# Altium PCB PCB1.PcbDoc
Units mil, origin at the board's own origin, x right, y up, seen from the top; angles counter-clockwise.
Board outline 6000 x 4000 mil, 2 copper layers (Top Layer, Bottom Layer); 280 components, 352 nets, 1024 pads, 0 vias.
Unrouted connection lines stored in the file: 551.
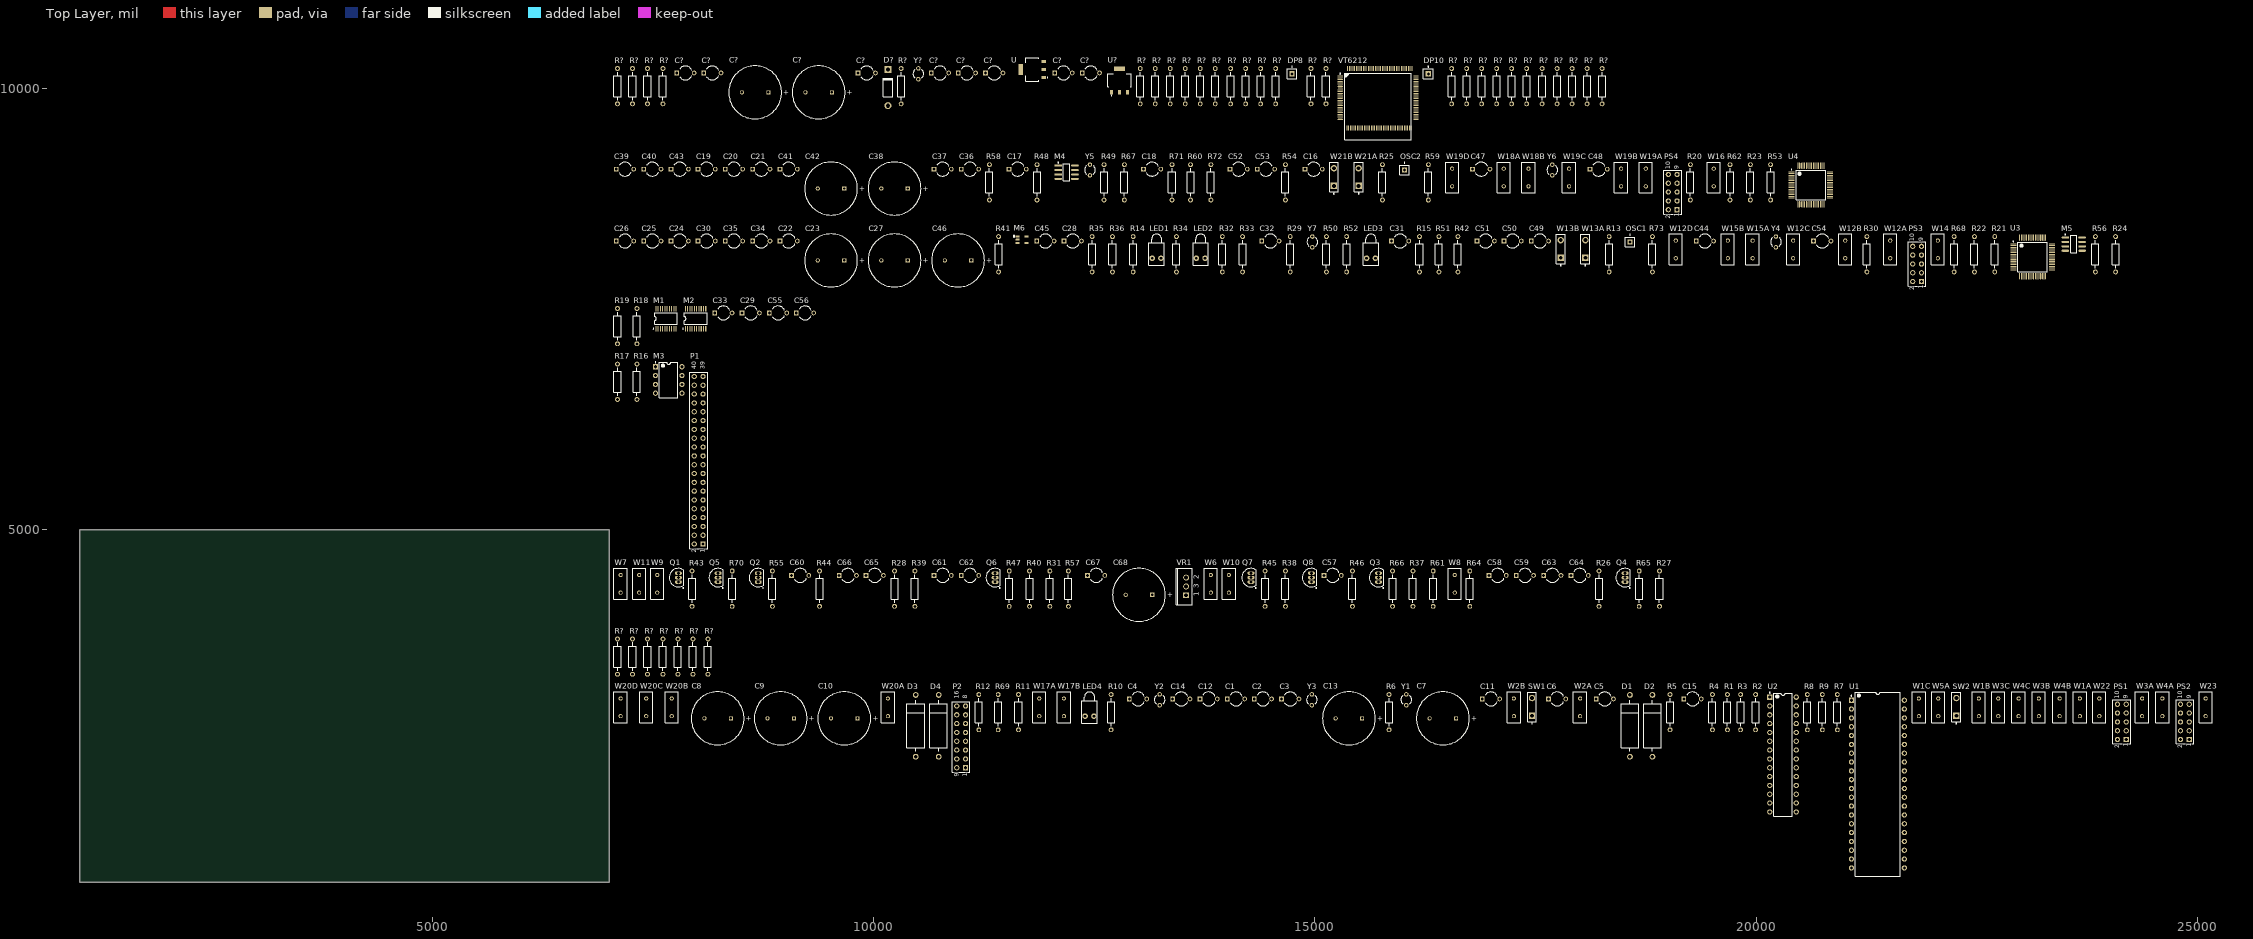
[diagram p0: Top Layer view]
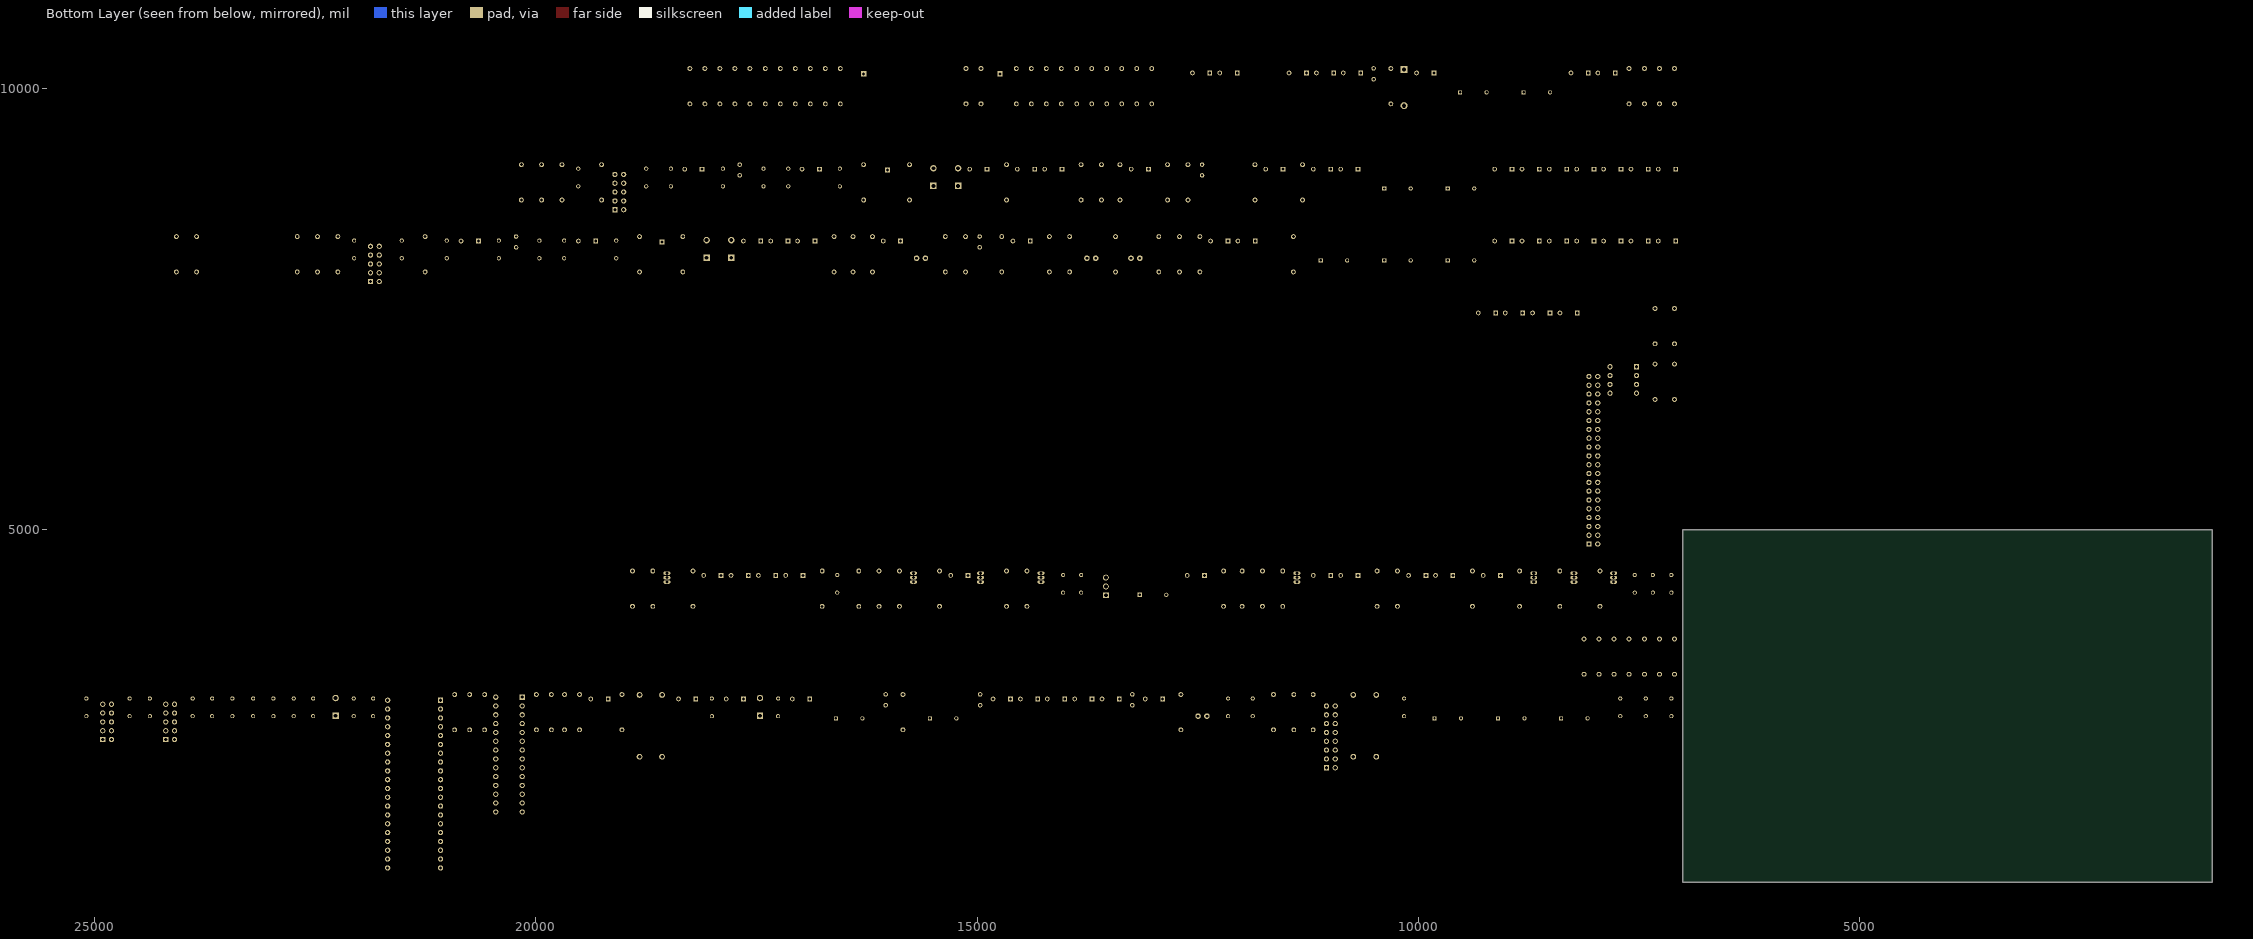
[diagram p1: Bottom Layer view, seen from below]

## Layer stack, top to bottom
Top Solder: solder mask 0.4, Solder Resist, Dk 3.5
Top Layer: signal copper 1.4
Dielectric 1: dielectric 12.6, FR-4, Dk 4.8
Bottom Layer: signal copper 1.4
Bottom Solder: solder mask 0.4, Solder Resist, Dk 3.5

## Board outline
1000,1000 7000,1000 7000,5000 1000,5000

## Design rules (kind name [scope] priority, off if disabled: settings)
Clearance [All] p1: gap=10 ignorepadtopadclearanceinfootprint=FALSE except(0: Arc-Hole Track-Hole SMDPad-Hole THPad-Hole Via-Hole Fill-Hole Poly-Hole Region-Hole Text-Hole)
PolygonConnect [All] p1: connectstyle=Relief reliefconductorwidth=10 reliefentries=4 polygonreliefangle="90 Angle" airgapwidth=10
RoutingVias [All] p1: holewidth=28 width=50 viastyle="Through Hole" minholewidth=28 minwidth=50 maxholewidth=28 maxwidth=50
SolderMaskExpansion [All] p1: expansion=4
Width [All] p1: maxlimit=10 minlimit=10 preferedwidth=10
30 further rules are at their usual default settings.

## Classes and differential pairs
component class "VT6212 Chipset": C? D? DP8 DP10 R? U U? VT6212 Y?
component class "STM32 Motherboard": C22 C23 C24 C25 C26 C27 C28 C30 C31 C32 C34 C35 C44 C45 C46 C49 C50 C51 C54 LED1 LED2 LED3 M5 M6 OSC1 PS3 R13 R14 R15 R21 R22 R24 R29 R30 R32 R33 R34 R35 R36 R41 R42 R50 R51 R52 R56 R68 R73 S1 U3 W12A W12B W12C W12D W13A W13B W14 W15A W15B Y4 Y7
component class "STM32 Motherboard 2": C16 C17 C18 C19 C20 C21 C36 C37 C38 C39 C40 C41 C42 C43 C47 C48 C52 C53 M4 OSC2 PS4 R20 R23 R25 R48 R49 R53 R54 R58 R59 R60 R62 R67 R71 R72 U4 W16 W18A W18B W19A W19B W19C W19D W21A W21B Y5 Y6
component class Shifters: C29 C33 C55 C56 M1 M2 R18 R19
component class "Raspberry Pi2+ Expansion Slot": M3 P1 R16 R17
component class RandomNumberGenerator: C57 C58 C59 C60 C61 C62 C63 C64 C65 C66 C67 C68 Q1 Q2 Q3 Q4 Q5 Q6 Q7 Q8 R26 R27 R28 R31 R37 R38 R39 R40 R43 R44 R45 R46 R47 R55 R57 R61 R64 R65 R66 R70 VR1 W6 W7 W8 W9 W10 W11
component class "PCI long card 5V - 32 BIT": PCI_BUS R?
component class "ATmega Motherboard": C1 C2 C3 C4 C5 C6 C7 C8 C9 C10 C11 C12 C13 C14 C15 D1 D2 D3 D4 LED4 P2 PS1 PS2 R1 R2 R3 R4 R5 R6 R7 R8 R9 R10 R11 R12 R69 SW1 SW2 U1 U2 W1A W1B W1C W2A W2B W3A W3B W3C W4A W4B W4C W5A W17A W17B W20A W20B W20C W20D W22 W23 Y1 Y2 Y3

## Components (designator, comment, footprint, x,y, rotation, side; value= is the part's Value field where it differs from the comment)
C1 "Cap2" CAPR5-4X5 14105,3080 r0 top value="22 pf"
C2 "Cap2" CAPR5-4X5 14410,3080 r0 top value="22 pf"
C3 "Cap2" CAPR5-4X5 14720,3080 r0 top value="22 pf"
C4 "Cap2" CAPR5-4X5 12995,3080 r0 top value="22 pf"
C5 "Cap2" CAPR5-4X5 18285,3080 r0 top value="0.1 uf"
C6 "Cap2" CAPR5-4X5 17745,3080 r0 top value="0.1 uf"
C7 "Cap Pol1" RB7.6-15 16450,2860 r0 top value="1 uf"
C8 "Cap Pol1" RB7.6-15 8230,2860 r0 top value="100 uf"
C9 "Cap Pol1" RB7.6-15 8945,2860 r0 top value="100 uf"
C10 "Cap Pol1" RB7.6-15 9665,2860 r0 top value="47 uf"
C11 "Cap2" CAPR5-4X5 16995,3080 r0 top value="22 pf"
C12 "Cap2" CAPR5-4X5 13795,3080 r0 top value="22 pf"
C13 "Cap Pol1" RB7.6-15 15385,2860 r0 top value="1 uf"
C14 "Cap2" CAPR5-4X5 13485,3080 r0 top value="0.1 uf"
C15 "Cap2" CAPR5-4X5 19280,3080 r0 top value="0.1 uf"
C16 "Cap2" CAPR5-4X5 14985,9085 r0 top value="0.1 uf"
C17 "Cap2" CAPR5-4X5 11630,9085 r0 top value="15 pf"
C18 "Cap2" CAPR5-4X5 13155,9085 r0 top value="15 pf"
C19 "Cap2" CAPR5-4X5 8105,9085 r0 top value="0.1 uf"
C20 "Cap2" CAPR5-4X5 8415,9085 r0 top value="0.1 uf"
C21 "Cap2" CAPR5-4X5 8725,9085 r0 top value="0.1 uf"
C22 "Cap2" CAPR5-4X5 9035,8270 r0 top value="0.1 uf"
C23 "Cap Pol1" RB7.6-15 9515,8050 r0 top value="10 uf"
C24 "Cap2" CAPR5-4X5 7800,8270 r0 top value="0.1 uf"
C25 "Cap2" CAPR5-4X5 7490,8270 r0 top value="0.1 uf"
C26 "Cap2" CAPR5-4X5 7180,8270 r0 top value="0.1 uf"
C27 "Cap Pol1" RB7.6-15 10235,8050 r0 top value="10 uf"
C28 "Cap2" CAPR5-4X5 12255,8270 r0 top value="0.1 uf"
C29 "Cap2" CAPR5-4X5 8605,7455 r0 top value="0.1 uf"
C30 "Cap2" CAPR5-4X5 8105,8270 r0 top value="0.1 uf"
C31 "Cap2" CAPR5-4X5 15965,8270 r0 top value="15 pf"
C32 "Cap2" CAPR5-4X5 14495,8270 r0 top value="15 pf"
C33 "Cap2" CAPR5-4X5 8295,7455 r0 top value="0.1 uf"
C34 "Cap2" CAPR5-4X5 8725,8270 r0 top value="0.1 uf"
C35 "Cap2" CAPR5-4X5 8415,8270 r0 top value="0.1 uf"
C36 "Cap2" CAPR5-4X5 11090,9085 r0 top value="0.1 uf"
C37 "Cap2" CAPR5-4X5 10780,9085 r0 top value="0.1 uf"
C38 "Cap Pol1" RB7.6-15 10235,8865 r0 top value="10 uf"
C39 "Cap2" CAPR5-4X5 7180,9085 r0 top value="0.1 uf"
C40 "Cap2" CAPR5-4X5 7490,9085 r0 top value="0.1 uf"
C41 "Cap2" CAPR5-4X5 9035,9085 r0 top value="0.1 uf"
C42 "Cap Pol1" RB7.6-15 9515,8865 r0 top value="10 uf"
C43 "Cap2" CAPR5-4X5 7800,9085 r0 top value="0.1 uf"
C44 "Cap2" CAPR5-4X5 19420,8270 r0 top value="15 pf"
C45 "Cap2" CAPR5-4X5 11945,8270 r0 top value="0.1 uf"
C46 "Cap Pol1" RB7.6-15 10955,8050 r0 top value="4.7 uf"
C47 "Cap2" CAPR5-4X5 16885,9085 r0 top value="15 pf"
C48 "Cap2" CAPR5-4X5 18215,9085 r0 top value="15 pf"
C49 "Cap2" CAPR5-4X5 17550,8270 r0 top value="0.1 uf"
C50 "ESR <2 Om" CAPR5-4X5 17240,8270 r0 top value="2.2 uf"
C51 "ESR <2 Om" CAPR5-4X5 16935,8270 r0 top value="2.2 uf"
C52 "ESR <2 Om" CAPR5-4X5 14135,9085 r0 top value="2.2 uf"
C53 "ESR <2 Om" CAPR5-4X5 14445,9085 r0 top value="2.2 uf"
C54 "Cap2" CAPR5-4X5 20750,8270 r0 top value="15 pf"
C55 "Cap2" CAPR5-4X5 8915,7455 r0 top value="0.1 uf"
C56 "Cap2" CAPR5-4X5 9220,7455 r0 top value="0.1 uf"
C57 "Cap2" CAPR5-4X5 15200,4480 r0 top value="0.1 uf"
C58 "Cap2" CAPR5-4X5 17070,4480 r0 top value="0.01 uf"
C59 "Cap2" CAPR5-4X5 17380,4480 r0 top value="1 uf"
C60 "Cap2" CAPR5-4X5 9165,4480 r0 top value="0.1 uf"
C61 "Cap2" CAPR5-4X5 10780,4480 r0 top value="0.01 uf"
C62 "Cap2" CAPR5-4X5 11090,4480 r0 top value="1 uf"
C63 "Cap2" CAPR5-4X5 17690,4480 r0 top value="0.047 uf"
C64 "Cap2" CAPR5-4X5 18000,4480 r0 top value="0.047 uf"
C65 "Cap2" CAPR5-4X5 10010,4480 r0 top value="0.047 uf"
C66 "Cap2" CAPR5-4X5 9705,4480 r0 top value="0.047 uf"
C67 "Cap2" CAPR5-4X5 12520,4480 r0 top value="0.1 uf"
C68 "Cap Pol1" RB7.6-15 13005,4260 r0 top value="100 uf"
C? "Cap2" CAPR5-4X5 12460,10175 r0 top value="0.02 uf"
C? "Cap2" CAPR5-4X5 12150,10175 r0 top value="0.1 uf"
C? "Cap2" CAPR5-4X5 9920,10175 r0 top value="27 pf"
C? "Cap2" CAPR5-4X5 10750,10175 r0 top value="27 pf"
C? "Cap2" CAPR5-4X5 8170,10175 r0 top value="0.1 uf"
C? "Cap2" CAPR5-4X5 7865,10175 r0 top value="0.1 uf"
C? "Cap2" CAPR5-4X5 11365,10175 r0 top value="0.02 uf"
C? "Cap2" CAPR5-4X5 11055,10175 r0 top value="0.1 uf"
C? "Cap Pol1" RB7.6-15 8655,9955 r0 top value="33 uf"
C? "Cap Pol1" RB7.6-15 9375,9955 r0 top value="33 uf"
D1 "3V6" DIODE-0.7 18570,2775 r90 top
D2 "3V6" DIODE-0.7 18825,2775 r90 top
D3 "3V6" DIODE-0.7 10475,2775 r90 top
D4 "3V6" DIODE-0.7 10735,2775 r90 top
D? "Diode 1N4007" DO-41 10160,10010 r90 top
DP8 "TP_VT6212_NC" PIN1 14740,10165 r0 top
DP10 "TP_VT6212 TEST2" PIN1 16285,10165 r0 top
LED1 "Red" LED-1 13205,8075 r90 top
LED2 "Red" LED-1 13705,8075 r90 top
LED3 "Blue" LED-1 15635,8075 r90 top
LED4 "Green" LED-1 12445,2885 r90 top
M1 "TXS0108EPWR" TSSOP20 7645,7390 r0 top
M2 "TXS0108EPWR" TSSOP20 7980,7390 r0 top
M3 "Atmel 24C64" DIP-8 7675,6695 r0 top
M4 "PCA82C250" 8S1_N 12185,9050 r0 top
M5 "PCA82C250" 8S1_N 23600,8235 r0 top
M6 "STMPS2141STR" SOT95P280X145-5N 11680,8285 r0 top
OSC1 "SWIM STM8" PIN1 18570,8260 r0 top
OSC2 "SWIM STM8" PIN1 16015,9075 r0 top
P1 "Raspberry Pi 2/3/4 Expansion Slot" HDR2X20 8065,4835 r90 top
P2 "SD Card Adapter" HDR2X8_CEN 11040,2300 r90 top
PS1 "ICSP ATmega16" HDR2X5 24195,2620 r90 top
PS2 "ICSP Atmega 8" HDR2X5 24910,2620 r90 top
PS3 "ST-Link/V2 Clone" HDR2X5 21875,7810 r90 top
PS4 "ST-Link/V2 Clone" HDR2X5 19105,8625 r90 top
Q1 "КТ3102 (BC182L)" TO-226-AA 7785,4455 r0 top
Q2 "BC549" TO-226-AA 8690,4455 r0 top
Q3 "2N3904" TO-226-AA 15720,4455 r0 top
Q4 "2N3904" TO-226-AA 18515,4455 r0 top
Q5 "2N3904" TO-226-AA 8235,4455 r0 top
Q6 "2N3904" TO-226-AA 11375,4455 r0 top
Q7 "КТ3102 (BC182L)" TO-226-AA 14275,4455 r0 top
Q8 "BC549" TO-226-AA 14960,4455 r0 top
R1 "Res2" AXIAL-0.4 19675,2930 r90 top value=4K7
R2 "Res2" AXIAL-0.4 19995,2930 r90 top value=4K7
R3 "Res2" AXIAL-0.4 19825,2930 r90 top value=1K5
R4 "Res2" AXIAL-0.4 19505,2930 r90 top value=68
R5 "Res2" AXIAL-0.4 19025,2930 r90 top value=68
R6 "Res2" AXIAL-0.4 15840,2930 r90 top value=100K
R7 "Res2" AXIAL-0.4 20920,2930 r90 top value=100K
R8 "Res2" AXIAL-0.4 20580,2930 r90 top value=4K7
R9 "Res2" AXIAL-0.4 20750,2930 r90 top value=4K7
R10 "Res2" AXIAL-0.4 12690,2930 r90 top value=68
R11 "Res2" AXIAL-0.4 11640,2930 r90 top value=68
R12 "Res2" AXIAL-0.4 11190,2930 r90 top value=1K5
R13 "Res2" AXIAL-0.4 18335,8120 r90 top value=100K
R14 "Res2" AXIAL-0.4 12940,8120 r90 top value=22
R15 "Res2" AXIAL-0.4 16185,8120 r90 top value=1K5
R16 "Res2" AXIAL-0.4 7315,6675 r90 top value=4K7
R17 "Res2" AXIAL-0.4 7095,6675 r90 top value=4K7
R18 "Res2" AXIAL-0.4 7315,7305 r90 top value=1K
R19 "Res2" AXIAL-0.4 7095,7305 r90 top value=1K
R20 "Res2" AXIAL-0.4 19255,8935 r90 top value=4K
R21 "Res2" AXIAL-0.4 22705,8120 r90 top value=100
R22 "Res2" AXIAL-0.4 22475,8120 r90 top value=1K
R23 "Res2" AXIAL-0.4 19935,8935 r90 top value=1K
R24 "Res2" AXIAL-0.4 24075,8120 r90 top value=100
R25 "Res2" AXIAL-0.4 15765,8935 r90 top value=100K
R26 "Res2" AXIAL-0.4 18220,4330 r90 top value=2M2
R27 "Res2" AXIAL-0.4 18905,4330 r90 top value=4K7
R28 "Res2" AXIAL-0.4 10235,4330 r90 top value=1M
R29 "Res2" AXIAL-0.4 14720,8120 r90 top value=22
R30 "Res2" AXIAL-0.4 21255,8120 r90 top value=4K
R31 "Res2" AXIAL-0.4 11995,4330 r90 top value=2M2
R32 "Res2" AXIAL-0.4 13950,8120 r90 top value=47K
R33 "Res2" AXIAL-0.4 14180,8120 r90 top value=620
R34 "Res2" AXIAL-0.4 13430,8120 r90 top value=620
R35 "Res2" AXIAL-0.4 12475,8120 r90 top value=0
R36 "Res2" AXIAL-0.4 12705,8120 r90 top value=10K
R37 "Res2" AXIAL-0.4 16110,4330 r90 top value=3K
R38 "Res2" AXIAL-0.4 14665,4330 r90 top value=1K
R39 "Res2" AXIAL-0.4 10465,4330 r90 top value=4K
R40 "Res2" AXIAL-0.4 11765,4330 r90 top value=1K
R41 "Res2" AXIAL-0.4 11415,8120 r90 top value=0
R42 "Res2" AXIAL-0.4 16620,8120 r90 top value=22
R43 "Res2" AXIAL-0.4 7940,4330 r90 top value=1K
R44 "Res2" AXIAL-0.4 9385,4330 r90 top value=3K
R45 "Res2" AXIAL-0.4 14435,4330 r90 top value=1K
R46 "Res2" AXIAL-0.4 15425,4330 r90 top value=3K
R47 "Res2" AXIAL-0.4 11535,4330 r90 top value=4K7
R48 "Res2" AXIAL-0.4 11850,8935 r90 top value=22
R49 "Res2" AXIAL-0.4 12610,8935 r90 top value=22
R50 "Res2" AXIAL-0.4 15130,8120 r90 top value=620
R51 "Res2" AXIAL-0.4 16405,8120 r90 top value=22
R52 "Res2" AXIAL-0.4 15360,8120 r90 top value=1K5
R53 "Res2" AXIAL-0.4 20165,8935 r90 top value=100
R54 "Res2" AXIAL-0.4 14665,8935 r90 top value=22
R55 "Res2" AXIAL-0.4 8850,4330 r90 top value=470K
R56 "Res2" AXIAL-0.4 23845,8120 r90 top value=10K
R57 "Res2" AXIAL-0.4 12205,4330 r90 top value=4K7
R58 "Res2" AXIAL-0.4 11310,8935 r90 top value=1K5
R59 "Res2" AXIAL-0.4 16285,8935 r90 top value=10K
R60 "Res2" AXIAL-0.4 13590,8935 r90 top value=100
R61 "Res2" AXIAL-0.4 16340,4330 r90 top value=1M
R62 "Res2" AXIAL-0.4 19705,8935 r90 top value=10K
R64 "Res2" AXIAL-0.4 16755,4330 r90 top value=470K
R65 "Res2" AXIAL-0.4 18675,4330 r90 top value=4K7
R66 "Res2" AXIAL-0.4 15880,4330 r90 top value=470K
R67 "Res2" AXIAL-0.4 12840,8935 r90 top value=10K
R68 "Res2" AXIAL-0.4 22245,8120 r90 top value=10K
R69 "Res2" AXIAL-0.4 11410,2930 r90 top value=620
R70 "Res2" AXIAL-0.4 8395,4330 r90 top value=470K
R71 "Res2" AXIAL-0.4 13380,8935 r90 top value=1K5
R72 "Res2" AXIAL-0.4 13820,8935 r90 top value=22
R73 "Res2" AXIAL-0.4 18825,8120 r90 top value=10K
R? "Res2" AXIAL-0.4 7435,3560 r90 top value=0
R? "Res2" AXIAL-0.4 7610,3560 r90 top value=0
R? "Res2" AXIAL-0.4 7950,3560 r90 top value=0
R? "Res2" AXIAL-0.4 8120,3560 r90 top value=0
R? "Res2" AXIAL-0.4 7780,3560 r90 top value=0
R? "Res2" AXIAL-0.4 7265,3560 r90 top value=5K
R? "Res2" AXIAL-0.4 7095,3560 r90 top value=5K
R? "Res2" AXIAL-0.4 7095,10025 r90 top value=0
R? "Res2" AXIAL-0.4 15125,10025 r90 top value=0
R? "Res2" AXIAL-0.4 14555,10025 r90 top value=0
R? "Res2" AXIAL-0.4 13870,10025 r90 top value=0
R? "Res2" AXIAL-0.4 7265,10025 r90 top value=0
R? "Res2" AXIAL-0.4 7435,10025 r90 top value=0
R? "Res2" AXIAL-0.4 7610,10025 r90 top value=0
R? "Res2" AXIAL-0.4 13700,10025 r90 top value=0
R? "Res2" AXIAL-0.4 14045,10025 r90 top value=0
R? "Res2" AXIAL-0.4 14215,10025 r90 top value=0
R? "Res2" AXIAL-0.4 14385,10025 r90 top value=0
R? "Res2" AXIAL-0.4 14955,10025 r90 top value=0
R? "Res2" AXIAL-0.4 13530,10025 r90 top value=4K7
R? "Res2" AXIAL-0.4 13360,10025 r90 top value=4K7
R? "Res2" AXIAL-0.4 13190,10025 r90 top value=4K7
R? "Res2" AXIAL-0.4 13020,10025 r90 top value=4K7
R? "Res2" AXIAL-0.4 16720,10025 r90 top value=15K
R? "Res2" AXIAL-0.4 16550,10025 r90 top value=15K
R? "Res2" AXIAL-0.4 17060,10025 r90 top value=15K
R? "Res2" AXIAL-0.4 16890,10025 r90 top value=15K
R? "Res2" AXIAL-0.4 17400,10025 r90 top value=15K
R? "Res2" AXIAL-0.4 17230,10025 r90 top value=15K
R? "Res2" AXIAL-0.4 17915,10025 r90 top value=15K
R? "Res2" AXIAL-0.4 17745,10025 r90 top value=15K
R? "Res2" AXIAL-0.4 10310,10025 r90 top value=105K
R? "Res2" AXIAL-0.4 18255,10025 r90 top value=4K7
R? "" AXIAL-0.4 18085,10025 r90 top value=4K7'
R? "1%" AXIAL-0.4 17575,10025 r90 top value=6.12K
SW1 "RESET" SPST-2 17460,2990 r90 top
SW2 "RESET" SPST-2 22270,2990 r90 top
U "AMS1117-3.3" SOT229P700X180-4N 11795,10215 r90 top
U1 "ATmega16-16PI" 40P6 21380,2115 r0 top
U2 "ATmega8-16PC" 28P3 20305,2450 r0 top
U3 "STM32F415RGT6" STM-LQFP64_N 23135,8090 r0 top
U4 "STM32F415RGT6" STM-LQFP64_N 20620,8905 r0 top
U? "AMS1117-3.3" SOT229P700X180-4N 12785,10090 r0 top
VR1 "L7809ABV" TO220ABN 13540,4355 r90 top
VT6212 "VIA VT6212 Chipset" "NXP LQFP-144 SOT486-1" 15715,9795 r0 top
W1A "SPI MOSI Shifter" RAD-0.2 23670,2985 r90 top
W1B "SPI MISO Shifter" RAD-0.2 22525,2985 r90 top
W1C "SPI SCK Shifter" RAD-0.2 21845,2985 r90 top
W2A "SPI Reset" RAD-0.2 18005,2985 r90 top
W2B "Button Reset" RAD-0.2 17255,2985 r90 top
W3A "SPI MCU MOSI" RAD-0.2 24375,2985 r90 top
W3B "SPI MCU SCK" RAD-0.2 23205,2985 r90 top
W3C "SPI MCU MISO" RAD-0.2 22745,2985 r90 top
W4A "MOSI" RAD-0.2 24605,2985 r90 top
W4B "SCK" RAD-0.2 23440,2985 r90 top
W4C "MISO" RAD-0.2 22975,2985 r90 top
W5A "Button Reset" RAD-0.2 22065,2985 r90 top
W6 "Rnd A2 Jumper" RAD-0.2 13820,4385 r90 top
W7 "Rnd B2 Jumper" RAD-0.2 7130,4385 r90 top
W8 "Rnd A1 Jumper" RAD-0.2 16585,4385 r90 top
W9 "Rnd B1 Jumper" RAD-0.2 7545,4385 r90 top
W10 "Rnd A0 Jumper" RAD-0.2 14025,4385 r90 top
W11 "Rnd B0 Jumper" RAD-0.2 7340,4385 r90 top
W12A "SPI MISO Shifter" RAD-0.2 21520,8175 r90 top
W12B "SPI MISO Shifter" RAD-0.2 21010,8175 r90 top
W12C "SPI MISO Shifter" RAD-0.2 20420,8175 r90 top
W12D "SPI MISO Shifter" RAD-0.2 19090,8175 r90 top
W13A "Circuit Breaker" SPST-2 18065,8180 r90 top
W13B "Circuit Breaker" SPST-2 17785,8180 r90 top
W14 "12V Sense" RAD-0.2 22060,8175 r90 top
W15A "Jumper" RAD-0.2 19960,8175 r90 top
W15B "Jumper" RAD-0.2 19680,8175 r90 top
W16 "12V Sense" RAD-0.2 19520,8990 r90 top
W17A "+5V" RAD-0.2 11875,2985 r90 top
W17B "+3.3V" RAD-0.2 12155,2985 r90 top
W18A "Jumper" RAD-0.2 17140,8990 r90 top
W18B "Jumper" RAD-0.2 17420,8990 r90 top
W19A "SPI MISO Shifter" RAD-0.2 18750,8990 r90 top
W19B "SPI MISO Shifter" RAD-0.2 18470,8990 r90 top
W19C "SPI MISO Shifter" RAD-0.2 17880,8990 r90 top
W19D "SPI MISO Shifter" RAD-0.2 16555,8990 r90 top
W20A "CPU1_SPI_CS" RAD-0.2 10160,2985 r90 top
W20B "CPU1_SPI_MOSI" RAD-0.2 7710,2985 r90 top
W20C "CPU1_SPI_SCK" RAD-0.2 7420,2985 r90 top
W20D "CPU1_SPI_MISO" RAD-0.2 7130,2985 r90 top
W21A "Circuit Breaker" SPST-2 15495,8995 r90 top
W21B "Circuit Breaker" SPST-2 15215,8995 r90 top
W22 "ICSP Power Pin" RAD-0.2 23890,2985 r90 top
W23 "ICSP Power Pin" RAD-0.2 25095,2985 r90 top
Y1 "32768" R38 16035,3070 r0 top
Y2 "16 Mhz" R38 13240,3070 r0 top
Y3 "16 Mhz" R38 14965,3070 r0 top
Y4 "26 mhz" R38 20225,8260 r0 top
Y5 "32768" R38 12450,9075 r0 top
Y6 "26 mhz" R38 17690,9075 r0 top
Y7 "32768" R38 14970,8260 r0 top
Y? "24 Mhz" R38 10505,10165 r0 top

## Footprints (in the part's own frame and the unit in brackets; to place one, negate y for a bottom-side part, rotate by r counter-clockwise, add the part's x,y. Pads: shape width x height; smd on the part's side, far side on the other; paste and mask are expansions set on the pad)
8S1_N [mm] "8-Pin Small Outline Integrated Circuit 1.27 mm Pitch, IPC Medium Density"
  oval 2.2x0.6 smd: 1(-2.4,1.905) 2(-2.4,0.635) 3(-2.4,-0.635) 4(-2.4,-1.905) 5(2.4,-1.905) 6(2.4,-0.635) 7(2.4,0.635) 8(2.4,1.905)
  silkscreen extent -2.52,-2.5 0.9,2.88, body extent -1.95,-2.45 1.95,2.45, height 1.73
28P3 [mm] "DIP, 28-Leads, Row Spacing 7.62mm, Pitch 2.54mm, Body 34.67x7.3mm"
  rect 1.5x1.5 hole 0.9: 1(-3.81,16.51)
  round 1.5 hole 0.9: 2(-3.81,13.97) 3(-3.81,11.43) 4(-3.81,8.89) 5(-3.81,6.35) 6(-3.81,3.81) 7(-3.81,1.27) 8(-3.81,-1.27) 9(-3.81,-3.81) 10(-3.81,-6.35) 11(-3.81,-8.89) 12(-3.81,-11.43) 13(-3.81,-13.97) 14(-3.81,-16.51) 15(3.81,-16.51) 16(3.81,-13.97) 17(3.81,-11.43) 18(3.81,-8.89) 19(3.81,-6.35) 20(3.81,-3.81) 21(3.81,-1.27) 22(3.81,1.27) 23(3.81,3.81) 24(3.81,6.35) 25(3.81,8.89) 26(3.81,11.43) 27(3.81,13.97) 28(3.81,16.51)
  silkscreen extent -3.93,-17.7 2.65,17.93, body extent -3.6,-17.65 3.6,17.65, height 4.58
40P6 [mm] "DIP, 40-Leads, Row Spacing 15.24mm, Pitch 2.54mm, Body 52.2x13.95mm"
  rect 1.5x1.5 hole 0.9: 1(-7.62,24.13)
  round 1.5 hole 0.9: 2(-7.62,21.59) 3(-7.62,19.05) 4(-7.62,16.51) 5(-7.62,13.97) 6(-7.62,11.43) 7(-7.62,8.89) 8(-7.62,6.35) 9(-7.62,3.81) 10(-7.62,1.27) 11(-7.62,-1.27) 12(-7.62,-3.81) 13(-7.62,-6.35) 14(-7.62,-8.89) 15(-7.62,-11.43) 16(-7.62,-13.97) 17(-7.62,-16.51) 18(-7.62,-19.05) 19(-7.62,-21.59) 20(-7.62,-24.13) 21(7.62,-24.13) 22(7.62,-21.59) 23(7.62,-19.05) 24(7.62,-16.51) 25(7.62,-13.97) 26(7.62,-11.43) 27(7.62,-8.89) 28(7.62,-6.35) 29(7.62,-3.81) 30(7.62,-1.27) 31(7.62,1.27) 32(7.62,3.81) 33(7.62,6.35) 34(7.62,8.89) 35(7.62,11.43) 36(7.62,13.97) 37(7.62,16.51) 38(7.62,19.05) 39(7.62,21.59) 40(7.62,24.13)
  silkscreen extent -7.74,-26.5 6.45,26.5, body extent -7.05,-26.47 7.05,26.47, height 4.83
AXIAL-0.4 [mm] "Axial Device, Thru-Hole; 2 Leads; 0.4 in Pin Spacing"
  round 1.4 hole 0.85: 1(-5.08,0) 2(5.08,0)
  silkscreen extent -4.06,-1.02 4.06,1.02
CAPR5-4X5 [mm] "Capacitor; 2 Leads"
  rect 1.35x1.35 hole 0.8: 1(-2.5,0)
  round 1.35 hole 0.8: 2(2.5,0)
  silkscreen extent -1.69,-2 1.82,2
DIODE-0.7 [mm] "Diode, Thru-Hole; 2 Leads; 0.7 in Pin Spacing"
  round 1.65 hole 1: 1(-8.89,0) 2(8.89,0)
  silkscreen extent -7.37,-2.54 7.37,2.54
DIP-8 [mm] "DIP; 8 Leads; Row Spacing 7.62 mm; Pitch 2.54 mm"
  rect 1.5x1.5 hole 0.9: 1(-3.81,3.81)
  round 1.5 hole 0.9: 2(-3.81,1.27) 3(-3.81,-1.27) 4(-3.81,-3.81) 5(3.81,-3.81) 6(3.81,-1.27) 7(3.81,1.27) 8(3.81,3.81)
  silkscreen extent -3.93,-5.15 2.65,5.23, body extent -3.6,-5.15 3.6,5.15, height 5.08
DO-41 [mm] "Diode, Axial; Body 5.2 x 2.7 mm (LxDia. max), Lead Dia. 0.86 mm (max)"
  round 2 hole 1.2: 1(-5.23,0)
  rect 2x2 hole 1.2: 2(5.23,0)
  silkscreen extent -2.65,-1.4 2.75,1.4
HDR2X5 [mm] "Connector; Header; 5x2 Position"
  rect 1.5x1.5 hole 0.9: 1(0,0)
  round 1.5 hole 0.9: 2(0,2.54) 3(2.54,0) 4(2.54,2.54) 5(5.08,0) 6(5.08,2.54) 7(7.62,0) 8(7.62,2.54) 9(10.16,0) 10(10.16,2.54)
  silkscreen extent -1.27,-1.27 11.43,3.81
HDR2X8_CEN [mm] "Connector; Header; 8x2 Position"
  rect 1.5x1.5 hole 0.9: 1(0,0)
  round 1.5 hole 0.9: 2(2.54,0) 3(5.08,0) 4(7.62,0) 5(10.16,0) 6(12.7,0) 7(15.24,0) 8(17.78,0) 9(0,2.54) 10(2.54,2.54) 11(5.08,2.54) 12(7.62,2.54) 13(10.16,2.54) 14(12.7,2.54) 15(15.24,2.54) 16(17.78,2.54)
  silkscreen extent -1.27,-1.27 19.05,3.81
HDR2X20 [mm] "Connector; Header; 20x2 Position"
  rect 1.5x1.5 hole 0.9: 1(0,0)
  round 1.5 hole 0.9: 2(0,2.54) 3(2.54,0) 4(2.54,2.54) 5(5.08,0) 6(5.08,2.54) 7(7.62,0) 8(7.62,2.54) 9(10.16,0) 10(10.16,2.54) 11(12.7,0) 12(12.7,2.54) 13(15.24,0) 14(15.24,2.54) 15(17.78,0) 16(17.78,2.54) 17(20.32,0) 18(20.32,2.54) 19(22.86,0) 20(22.86,2.54) 21(25.4,0) 22(25.4,2.54) 23(27.94,0) 24(27.94,2.54) 25(30.48,0) 26(30.48,2.54) 27(33.02,0) 28(33.02,2.54) 29(35.56,0) 30(35.56,2.54) 31(38.1,0) 32(38.1,2.54) 33(40.64,0) 34(40.64,2.54) 35(43.18,0) 36(43.18,2.54) 37(45.72,0) 38(45.72,2.54) 39(48.26,0) 40(48.26,2.54)
  silkscreen extent -1.27,-1.27 49.53,3.81
LED-1 [mm] "LED; 2 Leads"
  round 1.6 hole 0.8: 1(0,1.27) 2(0,-1.27)
  silkscreen extent -2,-2.2 6.95,2.2
"NXP LQFP-144 SOT486-1" [mm] "TQFP, 144-Leads, Body 20.00x20.00mm, Pitch 0.50mm, IPC Medium Density"
  oval 0.28x1.5 smd: 1(-8.95,-6.2) 2(-8.45,-6.2) 3(-7.95,-6.2) 4(-7.45,-6.2) 5(-6.95,-6.2) 6(-6.45,-6.2) 7(-5.95,-6.2) 8(-5.45,-6.2) 9(-4.95,-6.2) 10(-4.45,-6.2) 11(-3.95,-6.2) 12(-3.45,-6.2) 13(-2.95,-6.2) 14(-2.45,-6.2) 15(-1.95,-6.2) 16(-1.45,-6.2) 17(-0.95,-6.2) 18(-0.45,-6.2) 19(0.05,-6.2) 20(0.55,-6.2) 21(1.05,-6.2) 22(1.55,-6.2) 23(2.05,-6.2) 24(2.55,-6.2) 25(3.05,-6.2) 26(3.55,-6.2) 27(4.05,-6.2) 28(4.55,-6.2) 29(5.05,-6.2) 30(5.55,-6.2) 31(6.05,-6.2) 32(6.55,-6.2) 33(7.05,-6.2) 34(7.55,-6.2) 35(8.05,-6.2) 36(8.55,-6.2) 37(9.05,-6.2) 38(9.55,-6.2) 65(9.75,10.9) 66(9.25,10.9) 67(8.75,10.9) 68(8.25,10.9) 69(7.75,10.9) 70(7.25,10.9) 71(6.75,10.9) 72(6.25,10.9) 73(5.75,10.9) 74(5.25,10.9) 75(4.75,10.9) 76(4.25,10.9) 77(3.75,10.9) 78(3.25,10.9) 79(2.75,10.9) 80(2.25,10.9) 81(1.75,10.9) 82(1.25,10.9) 83(0.75,10.9) 84(0.25,10.9) 85(-0.25,10.9) 86(-0.75,10.9) 87(-1.25,10.9) 88(-1.75,10.9) 89(-2.25,10.9) 90(-2.75,10.9) 91(-3.25,10.9) 92(-3.75,10.9) 93(-4.25,10.9) 94(-4.75,10.9) 95(-5.25,10.9) 96(-5.75,10.9) 97(-6.25,10.9) 98(-6.75,10.9) 99(-7.25,10.9) 100(-7.75,10.9) 101(-8.25,10.9) 102(-8.75,10.9)
  oval 1.5x0.28 smd: 39(10.9,-3.75) 40(10.9,-3.25) 41(10.9,-2.75) 42(10.9,-2.25) 43(10.9,-1.75) 44(10.9,-1.25) 45(10.9,-0.75) 46(10.9,-0.25) 47(10.9,0.25) 48(10.9,0.75) 49(10.9,1.25) 50(10.9,1.75) 51(10.9,2.25) 52(10.9,2.75) 53(10.9,3.25) 54(10.9,3.75) 55(10.9,4.25) 56(10.9,4.75) 57(10.9,5.25) 58(10.9,5.75) 59(10.9,6.25) 60(10.9,6.75) 61(10.9,7.25) 62(10.9,7.75) 63(10.9,8.25) 64(10.9,8.75) 103(-10.9,8.75) 104(-10.9,8.25) 105(-10.9,7.75) 106(-10.9,7.25) 107(-10.9,6.75) 108(-10.9,6.25) 109(-10.9,5.75) 110(-10.9,5.25) 111(-10.9,4.75) 112(-10.9,4.25) 113(-10.9,3.75) 114(-10.9,3.25) 115(-10.9,2.75) 116(-10.9,2.25) 117(-10.9,1.75) 118(-10.9,1.25) 119(-10.9,0.75) 120(-10.9,0.25) 121(-10.9,-0.25) 122(-10.9,-0.75) 123(-10.9,-1.25) 124(-10.9,-1.75) 125(-10.9,-2.25) 126(-10.9,-2.75) 127(-10.9,-3.25) 128(-10.9,-3.75)
  silkscreen extent -11.02,-9.6 9.6,9.6, body extent -11.01,-11.01 11.01,11.01, height 1.63
PIN1 [mm] "Connector; Plug"
  rect 1.5x1.5 hole 0.9: 1(0,0)
  silkscreen extent -1.4,-1.4 1.4,2.17
R38 [mm] "Crystal, Thru-Hole; 2 Leads; Body 3.1 x 8.2 mm (Dia.xH)"
  round 1.3 hole 0.7: 1(0,1.55) 2(0,-1.55)
  silkscreen extent -1.55,-1.19 1.55,1.17
RAD-0.2 [mm] "Radial Cap, Thru-Hole; 2 Leads; 0.2 in Pin Spacing"
  round 1.2 hole 0.7: 1(-2.54,0) 2(2.54,0)
  silkscreen extent -4.44,-1.91 4.44,1.91
RB7.6-15 [mm] "Polarized Capacitor (Radial); 2 Leads"
  rect 1.2x1.2 hole 0.7: 1(3.81,0)
  round 1.2 hole 0.7: 2(-3.81,0)
  silkscreen extent -7.62,-7.62 7.62,7.62
SOT95P280X145-5N [mm]
  rrect50% 1.1x0.6 smd: 1(-1.3,0.95) 2(-1.3,0) 3(-1.3,-0.95) 4(1.3,-0.95) 5(1.3,0.95)
  silkscreen extent -2.52,0.78 -2.08,1.22
SOT229P700X180-4N [mm]
  rrect15% 0.93x1.31 smd: 1(-2.29,-3.345) 2(0,-3.345) 3(2.29,-3.345)
  rrect15% 3.24x1.31 smd: 4(0,3.345)
  silkscreen extent -3.36,-4.47 3.36,1.86
SPST-2 [mm] "Switch; 2 Leads"
  rect 1.85x1.85 hole 1.1: 1(-2.54,0)
  round 1.85 hole 1.1: 2(2.54,0)
  silkscreen extent -4.89,-1.27 4.28,1.27
STM-LQFP64_N [mm] "Thin QFP, 64-Leads, Body 10x10mm, Pitch 0.5mm, IPC Medium Density"
  oval 1.8x0.3 smd: 1(-5.55,3.75) 2(-5.55,3.25) 3(-5.55,2.75) 4(-5.55,2.25) 5(-5.55,1.75) 6(-5.55,1.25) 7(-5.55,0.75) 8(-5.55,0.25) 9(-5.55,-0.25) 10(-5.55,-0.75) 11(-5.55,-1.25) 12(-5.55,-1.75) 13(-5.55,-2.25) 14(-5.55,-2.75) 15(-5.55,-3.25) 16(-5.55,-3.75) 33(5.55,-3.75) 34(5.55,-3.25) 35(5.55,-2.75) 36(5.55,-2.25) 37(5.55,-1.75) 38(5.55,-1.25) 39(5.55,-0.75) 40(5.55,-0.25) 41(5.55,0.25) 42(5.55,0.75) 43(5.55,1.25) 44(5.55,1.75) 45(5.55,2.25) 46(5.55,2.75) 47(5.55,3.25) 48(5.55,3.75)
  oval 0.3x1.8 smd: 17(-3.75,-5.55) 18(-3.25,-5.55) 19(-2.75,-5.55) 20(-2.25,-5.55) 21(-1.75,-5.55) 22(-1.25,-5.55) 23(-0.75,-5.55) 24(-0.25,-5.55) 25(0.25,-5.55) 26(0.75,-5.55) 27(1.25,-5.55) 28(1.75,-5.55) 29(2.25,-5.55) 30(2.75,-5.55) 31(3.25,-5.55) 32(3.75,-5.55) 49(3.75,5.55) 50(3.25,5.55) 51(2.75,5.55) 52(2.25,5.55) 53(1.75,5.55) 54(1.25,5.55) 55(0.75,5.55) 56(0.25,5.55) 57(-0.25,5.55) 58(-0.75,5.55) 59(-1.25,5.55) 60(-1.75,5.55) 61(-2.25,5.55) 62(-2.75,5.55) 63(-3.25,5.55) 64(-3.75,5.55)
  silkscreen extent -5.67,-4.25 4.25,4.57, body extent -5,-5 5,5, height 1.6
TO220ABN [mm] "TO, Thru-Hole, Vertical, Heatsink Mounted; 3 In-Line Leads; Pitch 2.54 mm; Pin sequence 1, 3, 2"
  rect 1.7x1.7 hole 1.1: 1(-2.54,0)
  round 1.7 hole 1.1: 2(2.54,0) 3(0,0)
  silkscreen extent -5.2,-1.7 5.2,2.9
TO-226-AA [mm] "TO, Flat Index; 3 In-Line, Axial Leads; Body Dia. 4.8mm; Leads 0.55 x 0.51 mm (max)"
  oval 2x1 hole 0.9: 1(0,-1.27) 2(0,0) 3(0,1.27)
  silkscreen extent -2.65,-3.13 1.52,2.65, body extent -2.65,-2.66 1.52,2.66, height 5.33
TSSOP20 [mm] "Shrink Small Outline; 20 Leads; Body Width 4.4 mm; Pitch 0.65 mm"
  rect 0.3x1.6 smd: 1(-2.925,-2.85) 2(-2.275,-2.85) 3(-1.625,-2.85) 4(-0.975,-2.85) 5(-0.325,-2.85) 6(0.325,-2.85) 7(0.975,-2.85) 8(1.625,-2.85) 9(2.275,-2.85) 10(2.925,-2.85) 11(2.925,2.85) 12(2.275,2.85) 13(1.625,2.85) 14(0.975,2.85) 15(0.325,2.85) 16(-0.325,2.85) 17(-0.975,2.85) 18(-1.625,2.85) 19(-2.275,2.85) 20(-2.925,2.85)
  silkscreen extent -3.75,-2.97 3.3,1.65, body extent -3.43,-2.03 3.3,1.91, height 2.65

## Part data
C1 C2 C3 C4 C5 C6 C11 C12 C14 C15 C16 C17 C18 C19 C20 C21 C22 C24 C25 C26 C28 C29 C30 C31 C32 C33 C34 C35 C36 C37 C39 C40 C41 C43 C44 C45 C47 C48 C49 C54 C55 C56 C57 C58 C59 C60 C61 C62 C63 C64 C65 C66 C67 C? C? C? C? C? C? C? C?: "Capacitor", PackageDescription="Capacitor; 2 Leads", PackageReference=CAPR5-4X5, Published=23-Sep-2002, Publisher="Altium Limited"
C7 C8 C9 C10 C13 C23 C27 C38 C42 C46 C68 C? C?: "Polarized Capacitor (Radial)", LatestRevisionDate=17-Jul-2002, LatestRevisionNote="Re-released for DXP Platform.", PackageDescription="Polarized Capacitor (Radial); 2 Leads", PackageReference=RB7.6-15, Published=8-Jun-2000, Publisher="Altium Limited"
C50 C51 C52 C53: library part Cap2, "Capacitor", PackageDescription="Capacitor; 2 Leads", PackageReference=CAPR5-4X5, Published=23-Sep-2002, Publisher="Altium Limited"
D1 D2 D3 D4: library part "D Zener", "Zener Diode", LatestRevisionDate=17-Jul-2002, LatestRevisionNote="Re-released for DXP Platform.", PackageDescription="Diode, Thru-Hole; 2 Leads; 0.7 in Pin Spacing", PackageReference=DIODE-0.7, Published=8-Jun-2000, Publisher="Altium Limited"
D?: "1 Amp General Purpose Rectifier", Code_JEDEC=DO-204-AL, ComponentLink1Description="Manufacturer Link", ComponentLink1URL=http://www.fairchildsemi.com/, ComponentLink2Description=Datasheet, ComponentLink2URL=http://www.fairchildsemi.com/ds/1N%2F1N4001.pdf, DatasheetVersion=1998, LatestRevisionDate=17-Jul-2002, LatestRevisionNote="Re-released for DXP Platform.", PackageDescription="Diode, Axial; Body 5.2 x 2.7 mm (LxDia. max), Lead Dia. 0.86 mm (max)", PackageReference=DO-41, PackageVersion=Aug-1999, Published=8-Jun-2000, Publisher="Altium Limited"
DP8 DP10: library part Socket, "Socket", LatestRevisionDate=17-Jul-2002, LatestRevisionNote="Re-released for DXP Platform.", Publisher="Altium Limited"
LED1 LED2 LED3 LED4: library part LED1, "Typical RED GaAs LED", LatestRevisionDate=08-Jul-2005, LatestRevisionNote="Mech Layer 1 removed.", PackageDescription="LED; 2 Leads", PackageReference=LED-1, Published=8-Jun-2000, Publisher="Altium Limited"
M1 M2: library part "Header 10X2", "Header, 10-Pin, Dual row", LatestRevisionDate=17-Jul-2002, LatestRevisionNote="Re-released for DXP Platform.", Publisher="Altium Limited"
M3 M4 M5: library part SW-DIP4, "DIP Switch", LatestRevisionDate=17-Jul-2002, LatestRevisionNote="Re-released for DXP Platform.", PackageReference=DIP-8, Published=24-Mar-1999, Publisher="Altium Limited"
M6: "Power Switch/Driver 1:1 N-Channel 500mA SOT-23-5", Package="SOT-23 STMicroelectronics", Availability=Unavailable, MF=STMicroelectronics, MP=STMPS2141STR, Price=None, SnapEDA_Link=https://www.snapeda.com/parts/STMPS2141STR/STMicroelectronics/view-part/278790/?ref=snap
OSC1 OSC2: library part Plug, "Plug", LatestRevisionDate=17-Jul-2002, LatestRevisionNote="Re-released for DXP Platform.", Publisher="Altium Limited"
P1: library part "Header 20X2", "Header, 20-Pin, Dual row", LatestRevisionDate=17-Jul-2002, LatestRevisionNote="Re-released for DXP Platform.", Publisher="Altium Limited"
P2: library part "Header 8X2A", "Header, 8-Pin, Dual row", LatestRevisionDate=17-Jul-2002, LatestRevisionNote="Re-released for DXP Platform.", Publisher="Altium Limited"
PS1 PS2 PS3 PS4: library part "Header 5X2", "Header, 5-Pin, Dual row", LatestRevisionDate=17-Jul-2002, LatestRevisionNote="Re-released for DXP Platform.", Publisher="Altium Limited"
Q1 Q2 Q3 Q4 Q5 Q6 Q7 Q8: library part NPN, "NPN Bipolar Transistor", Code_JEDEC=TO-226-AA, LatestRevisionDate=17-Jul-2002, LatestRevisionNote="Re-released for DXP Platform.", PackageDescription="TO, Flat Index; 3 In-Line, Axial Leads; Body Dia. 4.8mm; Leads 0.55 x 0.51 mm (max)", PackageReference=TO-226-AA, Published=8-Jun-2000, Publisher="Altium Limited"
R1 R2 R3 R4 R5 R6 R7 R8 R9 R10 R11 R12 R13 R14 R15 R16 R17 R18 R19 R20 R21 R22 R23 R24 R25 R26 R27 R28 R29 R30 R31 R32 R33 R34 R35 R36 R37 R38 R39 R40 R41 R42 R43 R44 R45 R46 R47 R48 R49 R50 R51 R52 R53 R54 R55 R56 R57 R58 R59 R60 R61 R62 R64 R65 R66 R67 R68 R69 R70 R71 R72 R73 R? R? R? R? R? R? R? R? R? R? R? R? R? R? R? R? R? R? R? R? R? R? R? R? R? R? R? R? R? R? R? R? R?: "Resistor", LatestRevisionDate=17-Jul-2002, LatestRevisionNote="Re-released for DXP Platform.", PackageDescription="Axial Device, Thru-Hole; 2 Leads; 0.4 in Pin Spacing", PackageReference=AXIAL-0.4, Published=8-Jun-2000, Publisher="Altium Limited"
R? R?: library part Res2, "Resistor", LatestRevisionDate=17-Jul-2002, LatestRevisionNote="Re-released for DXP Platform.", PackageDescription="Axial Device, Thru-Hole; 2 Leads; 0.4 in Pin Spacing", PackageReference=AXIAL-0.4, Published=8-Jun-2000, Publisher="Altium Limited"
SW1 SW2: library part SW-PB, "Switch", LatestRevisionDate=17-Jul-2002, LatestRevisionNote="Re-released for DXP Platform.", PackageDescription="Switch; 2 Leads", PackageReference=SPST-2, Published=24-Mar-1999, Publisher="Altium Limited"
U U?: "Sot223/Pkg 1-Amp 3.3-Volt Low Drop Out Voltage Regulatator", Package=None, Availability=Unavailable, MF="Advanced Monolithic Systems", MP=AMS1117-3.3, Price=None, SnapEDA_Link=https://www.snapeda.com/parts/AMS1117-3.3/Advanced%20Monolithic%20Systems/view-part/53450/?ref=snap
U1: "8-Bit AVR Microcontroller with 16K Bytes of In-System Programmable Flash Memory", Supplier Part Number 1=ATMEGA16-16PI-ND, Code_JEDEC=MS-011-AC, ComponentLink1Description=Datasheet, ComponentLink1URL=http://www.atmel.com/dyn/resources/prod_documents/doc2466.pdf, ComponentLink2Description="Atmel.com Home", ComponentLink2URL=http://www.atmel.com, DatasheetVersion=2466E-AVR-10/02, PackageDescription="40-lead (0.600\"/15.24mm Wide) Plastic Dual Inline Package (PDIP)", PackageReference=40P6, PackageVersion="revB, Sep-2001", Published=17-Sep-2003, Publisher="Altium Limited", Supplier 1=Digi-Key, Supplier 2=Mouser, Supplier Part Number 2=556-ATMEGA16-16PI
U2: "8-Bit AVR Microcontroller with 8K Bytes of In-System Programmable Flash Memory", Supplier Part Number 1=ATMEGA8-16PC-ND, ComponentLink1Description=Datasheet, ComponentLink1URL=http://www.atmel.com/dyn/resources/prod_documents/doc2486.pdf, ComponentLink2Description="Atmel.com Home", ComponentLink2URL=http://www.atmel.com, DatasheetVersion=2486H-AVR-09/02, PackageDescription="28-lead (0.300\"/7.62mm Wide) Plastic Dual Inline Package (PDIP)", PackageReference=28P3, PackageVersion="revB, Sep-2001", Published=17-Sep-2003, Publisher="Altium Limited", Supplier 1=Digi-Key, Supplier 2=Mouser, Supplier Part Number 2=556-ATMEGA8-16PC
U3 U4: "ARM Cortex-M4 32-bit MCU+FPU, 210 DMIPS, 1024 kB Flash, 192 kB Internal RAM, 51 I/Os, 64-pin LQFP, -40 to 85 degC, Tray", I/Os (High Current)=51, Manufacturer=STMicroelectronics, Operating Frequency(F) (Processor speed) (MHz)=168, Supplier Part Number 1=497-11907-ND, Supply Voltage(Vcc) max (V)=3.6, Supply Voltage(Vcc) min (V)=1.8, ComponentLink1Description="Manufacturer URL", ComponentLink1URL=http://www.st.com/web/en/home.html, ComponentLink2Description=Datasheet, ComponentLink2URL=http://www.st.com/st-web-ui/static/active/en/resource/technical/document/datasheet/DM00035129.pdf, ComponentLink3Description="Package Specification", ComponentLink3URL=http://www.st.com/st-web-ui/static/active/en/resource/technical/document/datasheet/DM00037051.pdf, Core="ARM Cortex-M4", D/A Converter=2x12-bit, DatasheetVersion="Rev. 4", FLASH Size (Prog) (kB)=1024, Internal RAM Size (kB)=192, Mounting Technology="Surface Mount", PackageDescription="64-Pin Low Profile Quad Flat Package, 10 x 10 mm Body, 0.5 mm Pitch", PackageReference=LQFP64, PackageVersion="Rev. 4, 06/2013", Packing=Tray, PartNumber=STM32F415RGT6, Supplier 1=Digi-Key, Supplier 2=Farnell, Supplier 3=Newark, Supplier 4=Mouser, Supplier Part Number 2=2064370, Supplier Part Number 3=73T2335, Supplier Part Number 4=511-STM32F415RGT6
VR1: "Precision 1A Regulator", ComponentLink1Description="Manufacturer Link", ComponentLink1URL=http://www.st.com/, ComponentLink2Description=Datasheet, ComponentLink2URL=http://www.st.com/stonline/products/literature/ds/2144/l7805ab.pdf, DatasheetVersion=Nov-1999, LatestRevisionDate=17-Jul-2002, LatestRevisionNote="Re-released for DXP Platform.", PackageDescription="TO, Thru-Hole, Vertical, Heatsink Mounted; 3 In-Line Leads; Pitch 2.54 mm; Pin sequence 1, 3, 2", PackageReference=TO220ABN, PackageVersion=Jun-1998, Published=24-Aug-2001, Publisher="Altium Limited"
VT6212: library part VT6212, "VT6212 PCI 4-Port USB2 Host Controller PQFP-128"
W1A W1B W1C W2A W2B W3A W3B W3C W4A W4B W4C W5A W6 W7 W8 W9 W10 W11 W12A W12B W12C W12D W14 W16 W17A W17B W19A W19B W19C W19D W20A W20B W20C W20D W22 W23: library part Jumper, "Jumper Wire", LatestRevisionDate=17-Jul-2002, LatestRevisionNote="Re-released for DXP Platform.", PackageDescription="Radial Cap, Thru-Hole; 2 Leads; 0.2 in Pin Spacing", PackageReference=RAD-0.2, Published=24-Mar-1999, Publisher="Altium Limited"
W15A W15B W18A W18B: "Jumper Wire", LatestRevisionDate=17-Jul-2002, LatestRevisionNote="Re-released for DXP Platform.", PackageDescription="Radial Cap, Thru-Hole; 2 Leads; 0.2 in Pin Spacing", PackageReference=RAD-0.2, Published=24-Mar-1999, Publisher="Altium Limited"
Y1 Y2 Y3 Y4 Y5 Y6 Y7 Y?: library part XTAL, "Crystal Oscillator", LatestRevisionDate=17-Jul-2002, LatestRevisionNote="Re-released for DXP Platform.", PackageDescription="Crystal, Thru-Hole; 2 Leads; Body 3.1 x 8.2 mm (Dia.xH)", PackageReference=R38, Published=8-Jun-2000, Publisher="Altium Limited"
W13A W13B W21A W21B: LatestRevisionDate=17-Jul-2002, LatestRevisionNote="Re-released for DXP Platform.", PackageDescription="Switch; 2 Leads", PackageReference=SPST-2, Published=24-Mar-1999, Publisher="Altium Limited"

## Nets (pads, with @x,y where several pads share a name; then routed paths per layer and width w, separated by ;. In a path a pad name is that pad's centre, name@x,y a point inside that pad or via, vN(x,y) a via of type N, cw(c..) or ccw(c..) an arc to the next point about the centre after c; other vN are vias at no path point)
+3.3: C28.1 C33.1 C36.1 C37.1 C45.1 C55.1 C?.1@8805,9955 C?.1@10956.57,10175 C?.1@11266.57,10175 D?.1 M1.3 M2.3 R13.1 R15.2 R25.1 R32.2 R33.2 R36.1 R52.1 R58.1 R71.1 R?.1@7435,3360 R?.2@13700,10225 R?.2@14045,10225 R?.2@14215,10225 R?.2@14385,10225 R?.2@14955,10225 U.2 W12A.2 W12C.2 W15A.2 W17B.2 W19A.2 W19C.2
+3.3_SENSE: C?.1@12051.57,10175 C?.1@12361.57,10175 R?.2@13020,10225 R?.2@13190,10225 R?.2@13360,10225 R?.2@13530,10225 U?.2
+3.3V: W18B.2
+5: C5.2 C8.1 C9.1 C10.1 C15.1 C19.1 C20.1 C21.1 C22.1 C23.1 C24.1 C25.1 C26.1 C27.1 C29.1 C30.1 C34.1 C35.1 C38.1 C39.1 C40.1 C41.1 C42.1 C43.1 C56.1 M1.4 M2.4 M3.1 M3.7 M3.8 M4.3 M5.3 M6.5 R1.1 R2.1 R3.1 R6.1 R7.1 R8.1 R9.1 R12.2 R16.1 R17.1 R56.2 R67.2 R?.1@7265,3360 R?.2@7095,3760 R?.2@7610,3760 R?.2@7780,3760 U1.10 U2.7 U.3 U?.3 W15B.1 W17A.2 W18A.1 W22.2 W23.1
+9: C67.1 R27.2 R28.2 R57.2 R61.2 VR1.2
+12: C68.1 Q4.3 Q6.3 R22.2 R23.2 R47.2 R65.2 VR1.1
-12: 
AD0: 
AD1: 
AD2: 
AD3: 
AD4: 
AD5: 
AD6: 
AD7: 
AD8: 
AD9: 
AD10: 
AD11: 
AD12: 
AD13: 
AD14: 
AD15: 
AD16: 
AD17: 
AD18: 
AD19: 
AD20: 
AD21: 
AD22: 
AD23: 
AD24: 
AD25: 
AD26: 
AD27: 
AD28: 
AD29: 
AD30: 
AD31: 
ATmega8_Parallel_A1: M2.11
ATmega8_Parallel_A2: M2.13
ATmega8_Parallel_B1: M2.12
ATmega8_Parallel_B2: M2.14
ATmega16_Parallel_A1: M2.1
ATmega16_Parallel_A2: M2.5
ATmega16_Parallel_A3: M2.7
ATmega16_Parallel_A4: M2.9
ATmega16_Parallel_B1: M2.2 U2.11
ATmega16_Parallel_B2: M2.6 U2.12
ATmega16_Parallel_B3: M2.8
ATmega16_Parallel_B4: M2.10
C/BE0: 
C/BE1: 
C/BE2: 
C/BE3: 
CAN0_RX: M5.4 U3.61
CAN0_TX: M5.1 U3.62
CAN1_RX: M4.4 U4.61
CAN1_TX: M4.1 U4.62
CLK: 
CPU1_UART6_RX: U3.51 U4.43
CPU1_UART6_TX: U3.52 U4.42
DAC: U3.20 U4.20
DEVSEL#: 
FRAME#: 
GND: C1.2 C2.2 C3.2 C4.2 C6.2 C7.2 C8.2 C9.2 C10.2 C11.2 C12.2 C13.2 C14.2 C16.2 C17.2 C18.2 C19.2 C20.2 C21.2 C22.2 C23.2 C24.2 C25.2 C26.2 C27.2 C28.2 C29.2 C30.2 C31.2 C32.2 C33.2 C34.2 C35.2 C36.2 C37.2 C38.2 C39.2 C40.2 C41.2 C42.2 C43.2 C44.2 C45.2 C46.2 C47.2 C48.2 C49.2 C50.2 C51.2 C52.2 C53.2 C54.2 C55.2 C56.2 C67.2 C68.2 C?.2 D1.1 D2.1 D3.1 D4.1 LED2.2 LED3.2 LED4.2 M1.20 M2.20 M3.2 M3.3 M3.4 M4.2 M5.2 M6.2 P1.6 P1.9 P1.14 P1.20 P1.25 P1.30 P1.34 P1.39 P2.1 P2.8 P2.9 P2.16 PS1.10 PS2.10 PS3.3 PS4.3 Q1.2 Q2.3 Q3.3 Q5.3 Q7.2 Q8.3 R6.2 R7.2 R18.2 R19.2 R20.1 R30.1 R38.1 R40.1 R43.1 R45.1 R66.1 R70.1 R?.1@7095,9825 R?.1@7780,3360 R?.1@16550,9825 R?.1@16720,9825 R?.1@16890,9825 R?.1@17060,9825 R?.1@17230,9825 R?.1@17400,9825 R?.1@17575,9825 R?.1@17745,9825 R?.1@17915,9825 R?.1@18085,9825 R?.1@18255,9825 R?.2@7950,3760 R?.2@8120,3760 R?.2@13870,10225 R?.2@14555,10225 R?.2@15125,10225 SW1.1 SW2.1 U1.11 U1.31 U2.8 U2.22 U.1 U?.1 VR1.3 W12B.2 W12D.2 W13B.2 W19B.2 W19D.2 W21B.2
GNDPLL: R?.1@14555,9825
GNDSUS: R?.1@13870,9825 R?.1@15125,9825
GNDUSB1: R?.2@7095,10225
GNT#: 
I2C1_SCL: R1.2 R9.2 U1.22 U2.28
I2C1_SDA: R2.2 R8.2 U1.23 U2.27
I2C2_SCL: U3.58 U4.58
I2C2_SDA: U3.59 U4.59
I2C3_SCL: U4.29
I2C3_SDA: U4.30
IDSEL: 
INTA#: 
INTB#: 
INTC#: 
INTD#: 
IOPWR: R?.2@7435,3760
IRDY#: 
LED_ATmega8: R69.2
LED_BLUE: R50.2 U1.26
LED_RED: R34.2 U1.25
LOCK: 
NetC1_1: C1.1 U1.29 Y1.2
NetC2_1: C2.1 U1.28 Y1.1
NetC3_1: C3.1 U1.13 Y2.1
NetC4_1: C4.1 U1.12 Y2.2
NetC5_1: C5.1 U1.30
NetC6_1: C6.1 C7.1 U1.32
NetC11_1: C11.1 U2.10 Y3.1
NetC12_1: C12.1 U2.9 Y3.2
NetC13_1: C13.1 C14.1 U2.21
NetC15_2: C15.2 U2.20
NetC16_1: C16.1 U4.7 W21A.1 W21B.1
NetC17_1: C17.1 U4.3 Y5.1
NetC18_1: C18.1 U4.4 Y5.2
NetC31_1: C31.1 U3.4 Y7.2
NetC32_1: C32.1 U3.3 Y7.1
NetC44_1: C44.1 U3.6 Y4.1
NetC47_1: C47.1 U4.6 Y6.1
NetC48_1: C48.1 U4.5 Y6.2
NetC49_1: C49.1 U3.7 W13A.1 W13B.1
NetC50_1: C50.1 U3.31
NetC51_1: C51.1 U3.47
NetC52_1: C52.1 U4.47
NetC53_1: C53.1 U4.31
NetC54_1: C54.1 U3.5 Y4.2
NetC57_1: C57.1 Q7.3 R61.1
NetC57_2: C57.2 C58.1 Q8.2 R26.2
NetC58_2: C58.2 C59.1 Q8.1 R26.1 R27.1
NetC59_2: C59.2 R46.2
NetC60_1: C60.1 Q1.3 R28.1
NetC60_2: C60.2 C61.1 Q2.2 R31.2
NetC61_2: C61.2 C62.1 Q2.1 R31.1 R57.1
NetC62_2: C62.2 R44.2
NetC63_1: C63.1 Q4.2 R66.2
NetC63_2: C63.2 Q3.2 R64.2
NetC64_1: C64.1 Q3.1 R64.1 R65.1
NetC64_2: C64.2 R37.2
NetC65_1: C65.1 Q5.1 R47.1 R55.1
NetC65_2: C65.2 R39.2 W7.2
NetC66_1: C66.1 Q6.2 R70.2
NetC66_2: C66.2 Q5.2 R55.2
NetLED1_1: LED1.1 R33.1
NetLED1_2: LED1.2 M6.3 R32.1 R35.1
NetLED2_1: LED2.1 R34.1
NetLED3_1: LED3.1 R50.1
NetLED4_1: LED4.1 R69.1
NetM1_19: M1.19 R19.1
NetM2_19: M2.19 R18.1
NetM3_5: M3.5 P1.27 R17.2
NetM3_6: M3.6 P1.28 R16.2
NetM4_8: M4.8 R60.2 R67.1
NetM5_8: M5.8 R24.2 R56.1
NetM6_4: M6.4 R36.2 R41.1
NetOSC1_1: OSC1.1 PS3.5
NetOSC2_1: OSC2.1 PS4.5
NetP2_2: P2.2 P2.10 W17B.1
NetP2_3: P2.3 P2.11 W17A.1
NetP2_12: P2.12 W20A.1
NetP2_13: P2.13 W20B.1
NetP2_14: P2.14 W20C.1
NetP2_15: P2.15 W20D.1
NetPS1_1: PS1.1 W1A.2
NetPS1_2: PS1.2 W22.1
NetPS1_5: PS1.5 W2A.1
NetPS1_7: PS1.7 W1C.2
NetPS2_1: PS2.1 W4A.2
NetPS2_2: PS2.2 W23.2
NetPS2_7: PS2.7 W4B.2
NetPS2_9: PS2.9 W4C.2
NetPS3_2: PS3.2 U3.46
NetPS3_6: PS3.6 U3.49
NetPS3_8: PS3.8 W15A.1
NetPS3_9: PS3.9 PS3.10 W15B.2
NetPS4_2: PS4.2 U4.46
NetPS4_6: PS4.6 U4.49
NetPS4_8: PS4.8 W18B.1
NetPS4_9: PS4.9 PS4.10 W18A.2
NetR4_1: R4.1 U1.16
NetR5_1: R5.1 U1.17
NetR10_1: R10.1 U2.5
NetR11_1: R11.1 U2.4
NetR13_2: R13.2 W13A.2
NetR14_2: R14.2 R15.1
NetR20_2: R20.2 R23.1 W16.2
NetR21_2: R21.2 U3.14
NetR22_1: R22.1 R30.2 W14.2
NetR25_2: R25.2 W21A.2
NetR29_2: R29.2
NetR37_1: R37.1 R38.2 W6.2
NetR39_1: R39.1 R40.2
NetR43_2: R43.2 R44.1 W11.2
NetR45_2: R45.2 R46.1 W10.2
NetR53_2: R53.2 U4.14
NetR59_1: R59.1 U4.60
NetR59_2: R59.2 W19C.1 W19D.1
NetR62_1: R62.1 W19A.1 W19B.1
NetR62_2: R62.2 U4.28
NetR68_1: R68.1 W12A.1 W12B.1
NetR68_2: R68.2 U3.28
NetR73_1: R73.1 U3.60
NetR73_2: R73.2 W12C.1 W12D.1
NetSW1_2: SW1.2 W2B.1
NetSW2_2: SW2.2 W5A.1
NetU1_7: U1.7 W1B.1
NetU1_9: U1.9 W2A.2 W2B.2
NetU1_24: U1.24 U2.23
NetU1_40: U1.40 U2.15
NetU2_1: U2.1 W5A.2
NetU2_17: U2.17 W3A.2 W4A.1
NetU2_18: U2.18 W3C.2 W4C.1
NetU2_19: U2.19 W3B.2 W4B.1
NetU3_29: U3.29 W14.1
NetU4_33: U4.33 W16.1
NetVT6212_97: VT6212.97 VT6212.104
PAR: 
PCIRST#: 
PERR: 
PME#: 
PRSNT1: R?.1@7610,3360 R?.1@8120,3360
PRSNT2: R?.1@7950,3360
REQ#: 
RES: 
RESV01: 
RESV03: 
RESV05: 
Rnd_A0: U3.15 W10.1
Rnd_A1: U3.41 W8.1
Rnd_A2: U3.50 W6.1
Rnd_B0: U4.15 W11.1
Rnd_B1: U4.41 W9.1
Rnd_B2: U4.50 W7.1
RPES_3V3_Sence_0: P1.1 R21.1
RPES_3V3_Sence_1: P1.17 R53.1
RPES_5V_Sence_0: P1.2 U1.39
RPES_5V_Sence_1: P1.4 U2.24
RPES_B_GPIO_PA_4: M2.16 U1.36
RPES_B_GPIO_PA_5: M2.18 U1.37
RPES_B_GPIO_PA_6: M1.2 U1.21
RPES_B_GPIO_PA_7: M1.14 U1.38
RPES_B_GPIO_PB_4: U2.26
RPES_B_GPIO_PB_5: U2.13
RPES_B_GPIO_PB_6: M1.16 U2.6
RPES_B_GPIO_PB_7: M1.18
RPES_GPIO_PA_0: P1.7 U3.26
RPES_GPIO_PA_1: P1.11 U3.27
RPES_GPIO_PA_2: P1.13 U3.8
RPES_GPIO_PA_3: P1.15 U3.9
RPES_GPIO_PA_4: M2.15 P1.29 U3.24
RPES_GPIO_PA_5: M2.17 P1.31 U3.25
RPES_GPIO_PA_6: M1.1 P1.33
RPES_GPIO_PA_7: M1.13 P1.36
RPES_GPIO_PB_0: P1.12 U4.26
RPES_GPIO_PB_1: P1.16 U4.27
RPES_GPIO_PB_2: P1.18 U4.8
RPES_GPIO_PB_3: P1.22 U4.9
RPES_GPIO_PB_4: P1.24 U4.24
RPES_GPIO_PB_5: P1.26 U4.25
RPES_GPIO_PB_6: M1.15 P1.32
RPES_GPIO_PB_7: M1.17 P1.37
RPES_I2C_SCL: P1.5
RPES_I2C_SDA: P1.3
RPES_SPI0_MISO: P1.21 P1.35 U3.22
RPES_SPI0_MOSI: P1.19 P1.38 U3.23
RPES_SPI0_SCK: P1.23 P1.40 U3.21
RPES_UART_RX: P1.10 U3.42
RPES_UART_TX: P1.8 U3.43
SBO: R?.2@7265,3760
SD_CPU0_CS: P2.4 U3.39
SD_CPU0_MISO: P2.7 U3.56
SD_CPU0_MOSI: P2.5 U3.57
SD_CPU0_SCK: P2.6 U3.55
SD_CPU1_CS: U4.39 W20A.2
SD_CPU1_MISO: U4.56 W20D.2
SD_CPU1_MOSI: U4.57 W20B.2
SD_CPU1_SCK: U4.55 W20C.2
SDONE: R?.1@7095,3360
SERR: 
SlotA_CANH: M5.7
SlotA_CANL: M5.6
SlotA_CANRS: R24.1
SlotA_UART_RX: U3.37
SlotA_UART_TX: U3.38
SlotB_CANH: M4.7
SlotB_CANL: M4.6
SlotB_CANRS: R60.1 U4.40
SlotB_UART_RX: U4.37
SlotB_UART_TX: U4.38
SlotC_UART_RX: U3.53
SlotC_UART_TX: U3.54
SPI0_MISO: PS1.9 W1B.2 W3C.1
SPI0_MOSI: U1.6 W1A.1 W3A.1
SPI0_SCK: U1.8 W1C.1 W3B.1
SPI0_SS0: U1.5 U2.14
SPI0_SS1: U1.20 U2.16
SPI1_SS: U4.53
SPI2_MISO: U4.22
SPI2_MOSI: U4.23
SPI2_SCK: U4.21
SPI2_SS: U3.2 U4.2
SPI3_MISO: U3.10 U4.10
SPI3_MOSI: U3.11 U4.11
SPI3_SCK: U3.34 U4.34
SPI3_SS: U3.33
STOP#: 
TCK: 
TDI: 
TDO: 
TMS: 
TRDY#: 
TRST: 
UART0_A_ATmega16_RX: M1.5 U3.16
UART0_A_ATmega16_TX: M1.7 U3.17
UART0_B_ATmega16_RX: M1.6 U1.14
UART0_B_ATmega16_TX: M1.8 U1.15
UART2_A_ATmega8_RX: M1.9 U4.16
UART2_A_ATmega8_TX: M1.11 U4.17
UART2_B_ATmega8_RX: M1.10
UART2_B_ATmega8_TX: M1.12
UART_B_ATmega8_B_RX: U2.2
UART_B_ATmega8_B_TX: U2.3
USART3_RX: U4.52
USART3_TX: U4.51
USB0_D+: D2.2 R5.2
USB0_D-: D1.2 R3.2 R4.2
USB1_D+: D4.2 R10.2
USB1_D-: D3.2 R11.2 R12.1
USB2_D+: R51.1
USB2_D-: R42.1
USB2_STM_D+: R51.2 R52.2 U3.36
USB2_STM_D-: R42.2 U3.35
USB3_D+: R72.1
USB3_D-: R54.1
USB3_STM_D+: R71.2 R72.2 U4.36
USB3_STM_D-: R54.2 U4.35
USB5_D+: R48.1
USB5_D-: R49.1
USB5_STM_D+: R48.2 R58.2 U4.45
USB5_STM_D-: R49.2 U4.44
USBOC1#: R?.1@13020,9825
USBOC2#: R?.1@13190,9825
USBOC3#: R?.1@13360,9825
USBOC4#: R?.1@13530,9825
USBOTG_D+: R14.1 U3.45
USBOTG_D-: R29.1 U3.44
USBOTG_PWR_ENABLE: R41.2 U3.40
USBOTG_PWR_FAULT: R35.2 U3.30
USBOTG_VBUS: C46.1 M6.1
USBP1+: R?.2@16550,10225
USBP1-: R?.2@16720,10225
USBP2+: R?.2@17745,10225
USBP2-: R?.2@17915,10225
USBP3+: R?.2@17230,10225
USBP3-: R?.2@17400,10225
USBP4+: R?.2@16890,10225
USBP4-: R?.2@17060,10225
VCC25: C?.1@7766.57,10175 C?.1@8071.57,10175 C?.1@9525,9955 D?.2 R?.2@7265,10225 R?.2@7435,10225 R?.2@7610,10225
VCCOSC: R?.1@7265,9825
VCCPLL: R?.1@7610,9825
VCCPLLA: R?.1@7435,9825
VCCSUS: R?.1@14955,9825
VCCUSB1: R?.1@14385,9825
VCCUSB2: R?.1@14215,9825
VCCUSB3: R?.1@14045,9825
VCCUSB4: R?.1@13700,9825
XIN: C?.1@10651.57,10175 R?.2@10310,10225 Y?.2
XOUT: C?.1@9821.57,10175 R?.1@10310,9825 Y?.1
pads on no net: DP8.1 DP10.1 M4.5 M5.5 PS1.3 PS1.4 PS1.6 PS1.8 PS2.3 PS2.4 PS2.5 PS2.6 PS2.8 PS3.1 PS3.4 PS3.7 PS4.1 PS4.4 PS4.7 Q1.1 Q4.1 Q6.1 Q7.1 R?.2@17575,10225 R?.2@18085,10225 R?.2@18255,10225 U1.1 U1.2 U1.3 U1.4 U1.18 U1.19 U1.27 U1.33 U1.34 U1.35 U2.25 U3.1 U3.12 U3.13 U3.18 U3.19 U3.32 U3.48 U3.63 U3.64 U4.1 U4.12 U4.13 U4.18 U4.19 U4.32 U4.48 U4.54 U4.63 U4.64 U.4 U?.4 VT6212.1 VT6212.2 VT6212.3 VT6212.4 VT6212.5 VT6212.6 VT6212.7 VT6212.8 VT6212.9 VT6212.10 VT6212.11 VT6212.12 VT6212.13 VT6212.14 VT6212.15 VT6212.16 VT6212.17 VT6212.18 VT6212.19 VT6212.20 VT6212.21 VT6212.22 VT6212.23 VT6212.24 VT6212.25 VT6212.26 VT6212.27 VT6212.28 VT6212.29 VT6212.30 VT6212.31 VT6212.32 VT6212.33 VT6212.34 VT6212.35 VT6212.36 VT6212.37 VT6212.38 VT6212.39 VT6212.40 VT6212.41 VT6212.42 VT6212.43 VT6212.44 VT6212.45 VT6212.46 VT6212.47 VT6212.48 VT6212.49 VT6212.50 VT6212.51 VT6212.52 VT6212.53 VT6212.54 VT6212.55 VT6212.56 VT6212.57 VT6212.58 VT6212.59 VT6212.60 VT6212.61 VT6212.62 VT6212.63 VT6212.64 VT6212.65 VT6212.66 VT6212.67 VT6212.68 VT6212.69 VT6212.70 VT6212.71 VT6212.72 VT6212.73 VT6212.74 VT6212.75 VT6212.76 VT6212.77 VT6212.78 VT6212.79 VT6212.80 VT6212.81 VT6212.82 VT6212.83 VT6212.84 VT6212.85 VT6212.86 VT6212.87 VT6212.88 VT6212.89 VT6212.90 VT6212.91 VT6212.92 VT6212.93 VT6212.94 VT6212.95 VT6212.96 VT6212.98 VT6212.99 VT6212.100 VT6212.101 VT6212.102 VT6212.103 VT6212.105 VT6212.106 VT6212.107 VT6212.108 VT6212.109 VT6212.110 VT6212.111 VT6212.112 VT6212.113 VT6212.114 VT6212.115 VT6212.116 VT6212.117 VT6212.118 VT6212.119 VT6212.120 VT6212.121 VT6212.122 VT6212.123 VT6212.124 VT6212.125 VT6212.126 VT6212.127 VT6212.128 W8.2 W9.2

## Text inside footprints (layer, text, board x,y; h text height)
C7: Top Overlay "+" at 16770.15,2830.99 h59.06
C8: Top Overlay "+" at 8550.15,2830.99 h59.06
C9: Top Overlay "+" at 9265.15,2830.99 h59.06
C10: Top Overlay "+" at 9985.15,2830.99 h59.06
C13: Top Overlay "+" at 15705.15,2830.99 h59.06
C23: Top Overlay "+" at 9835.15,8020.99 h59.06
C27: Top Overlay "+" at 10555.15,8020.99 h59.06
C38: Top Overlay "+" at 10555.15,8835.99 h59.06
C42: Top Overlay "+" at 9835.15,8835.99 h59.06
C46: Top Overlay "+" at 11275.15,8020.99 h59.06
C68: Top Overlay "+" at 13325.15,4230.99 h59.06
C?: Top Overlay "+" at 9695.15,9925.99 h59.06
C?: Top Overlay "+" at 8975.15,9925.99 h59.06
P1: Top Overlay "1" at 8085,4735 h50 r90; Top Overlay "2" at 7985,4735 h50 r90; Top Overlay "40" at 7985,6815 h50 r90; Top Overlay "39" at 8085,6815 h50 r90
P2: Top Overlay "16" at 10960,3080 h50 r90; Top Overlay "8" at 11060,3080 h50 r90; Top Overlay "1" at 11060,2200 h50 r90; Top Overlay "9" at 10960,2200 h50 r90
PS1: Top Overlay "10" at 24115,3080 h50 r90; Top Overlay "9" at 24215,3080 h50 r90; Top Overlay "1" at 24215,2540 h50 r90; Top Overlay "2" at 24115,2520 h50 r90
PS2: Top Overlay "10" at 24830,3080 h50 r90; Top Overlay "9" at 24930,3080 h50 r90; Top Overlay "1" at 24930,2540 h50 r90; Top Overlay "2" at 24830,2520 h50 r90
PS3: Top Overlay "10" at 21795,8270 h50 r90; Top Overlay "9" at 21895,8270 h50 r90; Top Overlay "1" at 21895,7730 h50 r90; Top Overlay "2" at 21795,7710 h50 r90
PS4: Top Overlay "10" at 19025,9085 h50 r90; Top Overlay "9" at 19125,9085 h50 r90; Top Overlay "1" at 19125,8545 h50 r90; Top Overlay "2" at 19025,8525 h50 r90
VR1: Top Overlay "1" at 13684.69,4245.16 h59.06 r90; Top Overlay "2" at 13684.68,4435.32 h59.06 r90; Top Overlay "3" at 13684.68,4335.31 h59.06 r90